# EAGLE board tinynumitronboard-extended (EAGLE 6.3)

Size 100 x 50 mm. Coordinates in mm from the lower left corner, seen from the top.
Outline: 0,0 100,0 100,50 0,50 0,0
Copper layers (1*16): Top 0.035mm / dielectric 1.5mm / Bottom 0.035mm
Design rules "default": minimum track width 10mil, minimum drill 24mil, track to track 8mil, track to pad 8mil, pad to pad 8mil, via to via 8mil, smd to smd 8mil, copper to edge 40mil, drill to drill 8mil, minimum pad ring 10mil, minimum via ring 8mil, stop-mask expansion 4mil, vias tented up to drill 0mil, thermal gap 10mil

## Footprints (pad centres in the part's own frame; a part is rotated, then mirrored left to right if it is on the bottom)
C050-024X044 = drill 0.813 octagon: 1 -2.54,0; 2 2.54,0
2,8 = hole 2.8: 0,0
1X06 = drill 1.016 pad 1.88: 1 0,0; 2 2.54,0; 3 5.08,0; 4 7.62,0; 5 10.16,0; 6 12.7,0
KA-3528ASYC = smd 1.5 x 2.2: A -1.55,0; C 1.55,0
0207/10 = drill 0.813 octagon: 1 -5.08,0; 2 5.08,0
IV16TINY_NUMITRON_PAC = drill 0.8: DOT 2.54,-3.175; PB -3.81,1.27; PBL -3.81,-1.27; PBR 3.81,1.27; PM -2.54,3.175; PT 2.54,3.175; PTL 0,3.81; PTR 3.81,-1.27; VCC 0,-3.81
DIL16_SO16_PAC2 = drill 0.813 long: 1 -8.89,-2.54; 2 -6.35,-2.54; 3 -3.81,-2.54; 4 -1.27,-2.54; 5 1.27,-2.54; 6 3.81,-2.54; 7 6.35,-2.54; 8 8.89,-2.54; 9 8.89,5.08; 10 6.35,5.08; 11 3.81,5.08; 12 1.27,5.08; 13 -1.27,5.08; 14 -3.81,5.08; 15 -6.35,5.08; 16 -8.89,5.08 | smd 0.635 x 2.032: S1 -5.08,-5.715; S2 -3.81,-5.715; S3 -2.54,-5.715; S4 -1.27,-5.715; S5 0,-5.715; S6 1.27,-5.715; S7 2.54,-5.715; S8 3.81,-5.715; S9 3.81,0.635; S10 2.54,0.635; S11 1.27,0.635; S12 0,0.635; S13 -1.27,0.635; S14 -2.54,0.635; S15 -3.81,0.635; S16 -5.08,0.635

## Placement (x,y rotation side)
C1  1uF  [C050-024X044]  50,25 270 top
H1  MOUNT-HOLE2.8  [2,8]  3.81,46.04 0 top
H2  MOUNT-HOLE2.8  [2,8]  96.52,46.04 0 top
H3  MOUNT-HOLE2.8  [2,8]  96.52,3.81 0 top
H4  MOUNT-HOLE2.8  [2,8]  3.81,3.81 0 top
JP_INPUT  [1X06]  2.54,17.78 90 top
JP_OUTPUT  [1X06]  97.79,17.78 90 top
LED1  [KA-3528ASYC]  12.5,25 0 top
LED2  [KA-3528ASYC]  37.5,25 0 top
LED3  [KA-3528ASYC]  62.5,25 0 top
LED4  [KA-3528ASYC]  87.5,25 0 top
R1  [0207/10]  8.89,41.91 270 top
R2  [0207/10]  11.43,41.91 270 top
R3  [0207/10]  13.97,41.91 270 top
R4  [0207/10]  16.51,41.91 270 top
R5  [0207/10]  19.05,41.91 270 top
R6  [0207/10]  21.59,41.91 270 top
R7  [0207/10]  24.13,41.91 270 top
R8  [0207/10]  26.67,41.91 270 top
R9  [0207/10]  74.3,8.89 90 top
R10  [0207/10]  76.83,8.89 90 top
R11  [0207/10]  79.38,8.89 90 top
R12  [0207/10]  81.92,8.89 90 top
R13  [0207/10]  84.45,8.89 90 top
R14  [0207/10]  87,8.89 90 top
R15  [0207/10]  89.53,8.89 90 top
R16  [0207/10]  92.08,8.89 90 top
R17  [0207/10]  51.75,41.91 270 top
R18  [0207/10]  54.29,41.91 270 top
R19  [0207/10]  56.83,41.91 270 top
R20  [0207/10]  69.53,41.91 270 top
R21  [0207/10]  66.99,41.91 270 top
R22  [0207/10]  64.45,41.91 270 top
R23  [0207/10]  61.91,41.91 270 top
R24  [0207/10]  59.37,41.91 270 top
R25  [0207/10]  29.21,10.16 90 top
R26  [0207/10]  31.75,10.16 90 top
R27  [0207/10]  34.29,10.16 90 top
R28  [0207/10]  36.83,10.16 90 top
R29  [0207/10]  39.37,10.16 90 top
R30  [0207/10]  41.91,10.16 90 top
R31  [0207/10]  44.45,10.16 90 top
R32  [0207/10]  46.99,10.16 90 top
U$1  IV16TINY_NUMITRON  [IV16TINY_NUMITRON_PAC]  12.5,25 0 top
U$2  IV16TINY_NUMITRON  [IV16TINY_NUMITRON_PAC]  87.5,25 0 top
U$5  IV16TINY_NUMITRON  [IV16TINY_NUMITRON_PAC]  37.5,25 0 top
U$7  IV16TINY_NUMITRON  [IV16TINY_NUMITRON_PAC]  62.5,25 0 top
UC1  74HC595_SMDDIP_COMBOTHINPAD  [DIL16_SO16_PAC2]  39.37,40.64 0 bottom
UC2  74HC595_SMDDIP_COMBOTHINPAD  [DIL16_SO16_PAC2]  82.87,40.64 0 bottom
UC3  74HC595_SMDDIP_COMBOTHINPAD  [DIL16_SO16_PAC2]  17.14,11.11 180 bottom
UC4  74HC595_SMDDIP_COMBOTHINPAD  [DIL16_SO16_PAC2]  61.59,10.16 180 bottom

## Library data of the parts
C1 R1-R32 = resistor
H1-H4 = holes
JP_INPUT JP_OUTPUT = SparkFun
LED1-LED4 = led
U$1 U$2 U$5 U$7 UC1-UC4 = kalshagar

## Nets
GND: C1.2 JP_INPUT.1 JP_OUTPUT.1 LED1.C LED2.C LED3.C LED4.C UC1.8 UC1.13 UC1.S8 UC1.S13 UC2.8 UC2.13 UC2.S8 UC2.S13 UC3.8 UC3.13 UC3.S8 UC3.S13 UC4.8 UC4.13 UC4.S8 UC4.S13
N$1: R1.2 U$1.PBL
N$2: R2.2 U$1.PB
N$3: R3.2 U$1.PM
N$4: R4.2 U$1.PTL
N$5: R5.2 U$1.PT
N$6: R6.2 U$1.PBR
N$7: R7.2 U$1.PTR
N$8: R1.1 UC1.15 UC1.S15
N$9: R2.1 UC1.1 UC1.S1
N$10: R3.1 UC1.2 UC1.S2
N$11: R4.1 UC1.3 UC1.S3
N$12: R5.1 UC1.4 UC1.S4
N$13: R6.1 UC1.5 UC1.S5
N$14: R7.1 UC1.6 UC1.S6
N$16: R8.1 UC1.7 UC1.S7
N$17: LED1.A R8.2 U$1.DOT
N$20: R9.2 U$2.PBL
N$21: R10.2 U$2.PB
N$22: JP_OUTPUT.5 JP_OUTPUT.6 UC4.9 UC4.S9
N$23: UC1.9 UC1.S9 UC2.14 UC2.S14
N$24: R11.2 U$2.PM
N$25: R12.2 U$2.PTL
N$26: R13.2 U$2.PT
N$27: R14.2 U$2.PBR
N$28: R15.2 U$2.PTR
N$29: R9.1 UC4.15 UC4.S15
N$30: R10.1 UC4.1 UC4.S1
N$31: R11.1 UC4.2 UC4.S2
N$32: R12.1 UC4.3 UC4.S3
N$33: R13.1 UC4.4 UC4.S4
N$34: R14.1 UC4.5 UC4.S5
N$35: R15.1 UC4.6 UC4.S6
N$36: R16.1 UC4.7 UC4.S7
N$37: LED4.A R16.2 U$2.DOT
N$39: R17.2 U$5.PBL
N$40: R18.2 U$5.PB
N$41: R19.2 U$5.PM
N$42: R20.2 U$5.PTL
N$43: R21.2 U$5.PT
N$44: R22.2 U$5.PBR
N$45: R23.2 U$5.PTR
N$46: R17.1 UC2.15 UC2.S15
N$47: R18.1 UC2.1 UC2.S1
N$48: R19.1 UC2.2 UC2.S2
N$49: R20.1 UC2.3 UC2.S3
N$50: R21.1 UC2.4 UC2.S4
N$51: R22.1 UC2.5 UC2.S5
N$52: R23.1 UC2.6 UC2.S6
N$53: R24.1 UC2.7 UC2.S7
N$54: LED2.A R24.2 U$5.DOT
N$58: UC2.9 UC2.S9 UC3.14 UC3.S14
N$62: R25.2 U$7.PBL
N$63: R26.2 U$7.PB
N$64: R27.2 U$7.PM
N$65: R28.2 U$7.PTL
N$66: R29.2 U$7.PT
N$67: R30.2 U$7.PBR
N$68: R31.2 U$7.PTR
N$69: R25.1 UC3.15 UC3.S15
N$70: R26.1 UC3.1 UC3.S1
N$71: R27.1 UC3.2 UC3.S2
N$72: R28.1 UC3.3 UC3.S3
N$73: R29.1 UC3.4 UC3.S4
N$74: R30.1 UC3.5 UC3.S5
N$75: R31.1 UC3.6 UC3.S6
N$76: R32.1 UC3.7 UC3.S7
N$77: LED3.A R32.2 U$7.DOT
N$78: UC3.9 UC3.S9 UC4.14 UC4.S14
RCK: C1.1 JP_INPUT.4 JP_OUTPUT.4 UC1.12 UC1.S12 UC2.12 UC2.S12 UC3.12 UC3.S12 UC4.12 UC4.S12
SCK: JP_INPUT.3 JP_OUTPUT.3 UC1.11 UC1.S11 UC2.11 UC2.S11 UC3.11 UC3.S11 UC4.11 UC4.S11
SER: JP_INPUT.5 JP_INPUT.6 UC1.14 UC1.S14
VCC: JP_INPUT.2 JP_OUTPUT.2 U$1.VCC U$2.VCC U$5.VCC U$7.VCC UC1.10 UC1.16 UC1.S10 UC1.S16 UC2.10 UC2.16 UC2.S10 UC2.S16 UC3.10 UC3.16 UC3.S10 UC3.S16 UC4.10 UC4.16 UC4.S10 UC4.S16

## Tracks (layer width: path | path; a pad name or v marks a point on that pad's centre or on a via)
GND  (18 unrouted)
N$1  (1 unrouted)
N$2  (1 unrouted)
N$3  (1 unrouted)
N$4  (1 unrouted)
N$5  (1 unrouted)
N$6  (1 unrouted)
N$7  (1 unrouted)
N$8  (1 unrouted)
N$9  (2 unrouted)
N$10  (1 unrouted)
N$11  (1 unrouted)
N$12  (1 unrouted)
N$13  (2 unrouted)
N$14  (1 unrouted)
N$16  (1 unrouted)
N$17  (2 unrouted)
N$20  (1 unrouted)
N$21  (1 unrouted)
N$22  (3 unrouted)
N$23  (2 unrouted)
N$24  (1 unrouted)
N$25  (1 unrouted)
N$26  (1 unrouted)
N$27  (1 unrouted)
N$28  (1 unrouted)
N$29  (1 unrouted)
N$30  (2 unrouted)
N$31  (1 unrouted)
N$32  (1 unrouted)
N$33  (1 unrouted)
N$34  (2 unrouted)
N$35  (1 unrouted)
N$36  (1 unrouted)
N$37  (2 unrouted)
N$39  (1 unrouted)
N$40  (1 unrouted)
N$41  (1 unrouted)
N$42  (1 unrouted)
N$43  (1 unrouted)
N$44  (1 unrouted)
N$45  (1 unrouted)
N$46  (1 unrouted)
N$47  (2 unrouted)
N$48  (1 unrouted)
N$49  (1 unrouted)
N$50  (1 unrouted)
N$51  (2 unrouted)
N$52  (1 unrouted)
N$53  (1 unrouted)
N$54  (2 unrouted)
N$58  (2 unrouted)
N$62  (1 unrouted)
N$63  (1 unrouted)
N$64  (1 unrouted)
N$65  (1 unrouted)
N$66  (1 unrouted)
N$67  (1 unrouted)
N$68  (1 unrouted)
N$69  (1 unrouted)
N$70  (2 unrouted)
N$71  (1 unrouted)
N$72  (1 unrouted)
N$73  (1 unrouted)
N$74  (2 unrouted)
N$75  (1 unrouted)
N$76  (1 unrouted)
N$77  (2 unrouted)
N$78  (2 unrouted)
RCK  (6 unrouted)
SCK  (5 unrouted)
SER  (2 unrouted)
VCC  (13 unrouted)